# Altium PCB PCB1.PcbDoc (part 2 of 3)
Units mil, origin at the board's own origin, x right, y up, seen from the top; angles counter-clockwise.
Board outline 3937.79 x 3937.79 mil, 4 copper layers (L1, L2, L3, L4), stack 61.811 mil thick; 103 components, 203 nets, 917 pads, 494 vias.
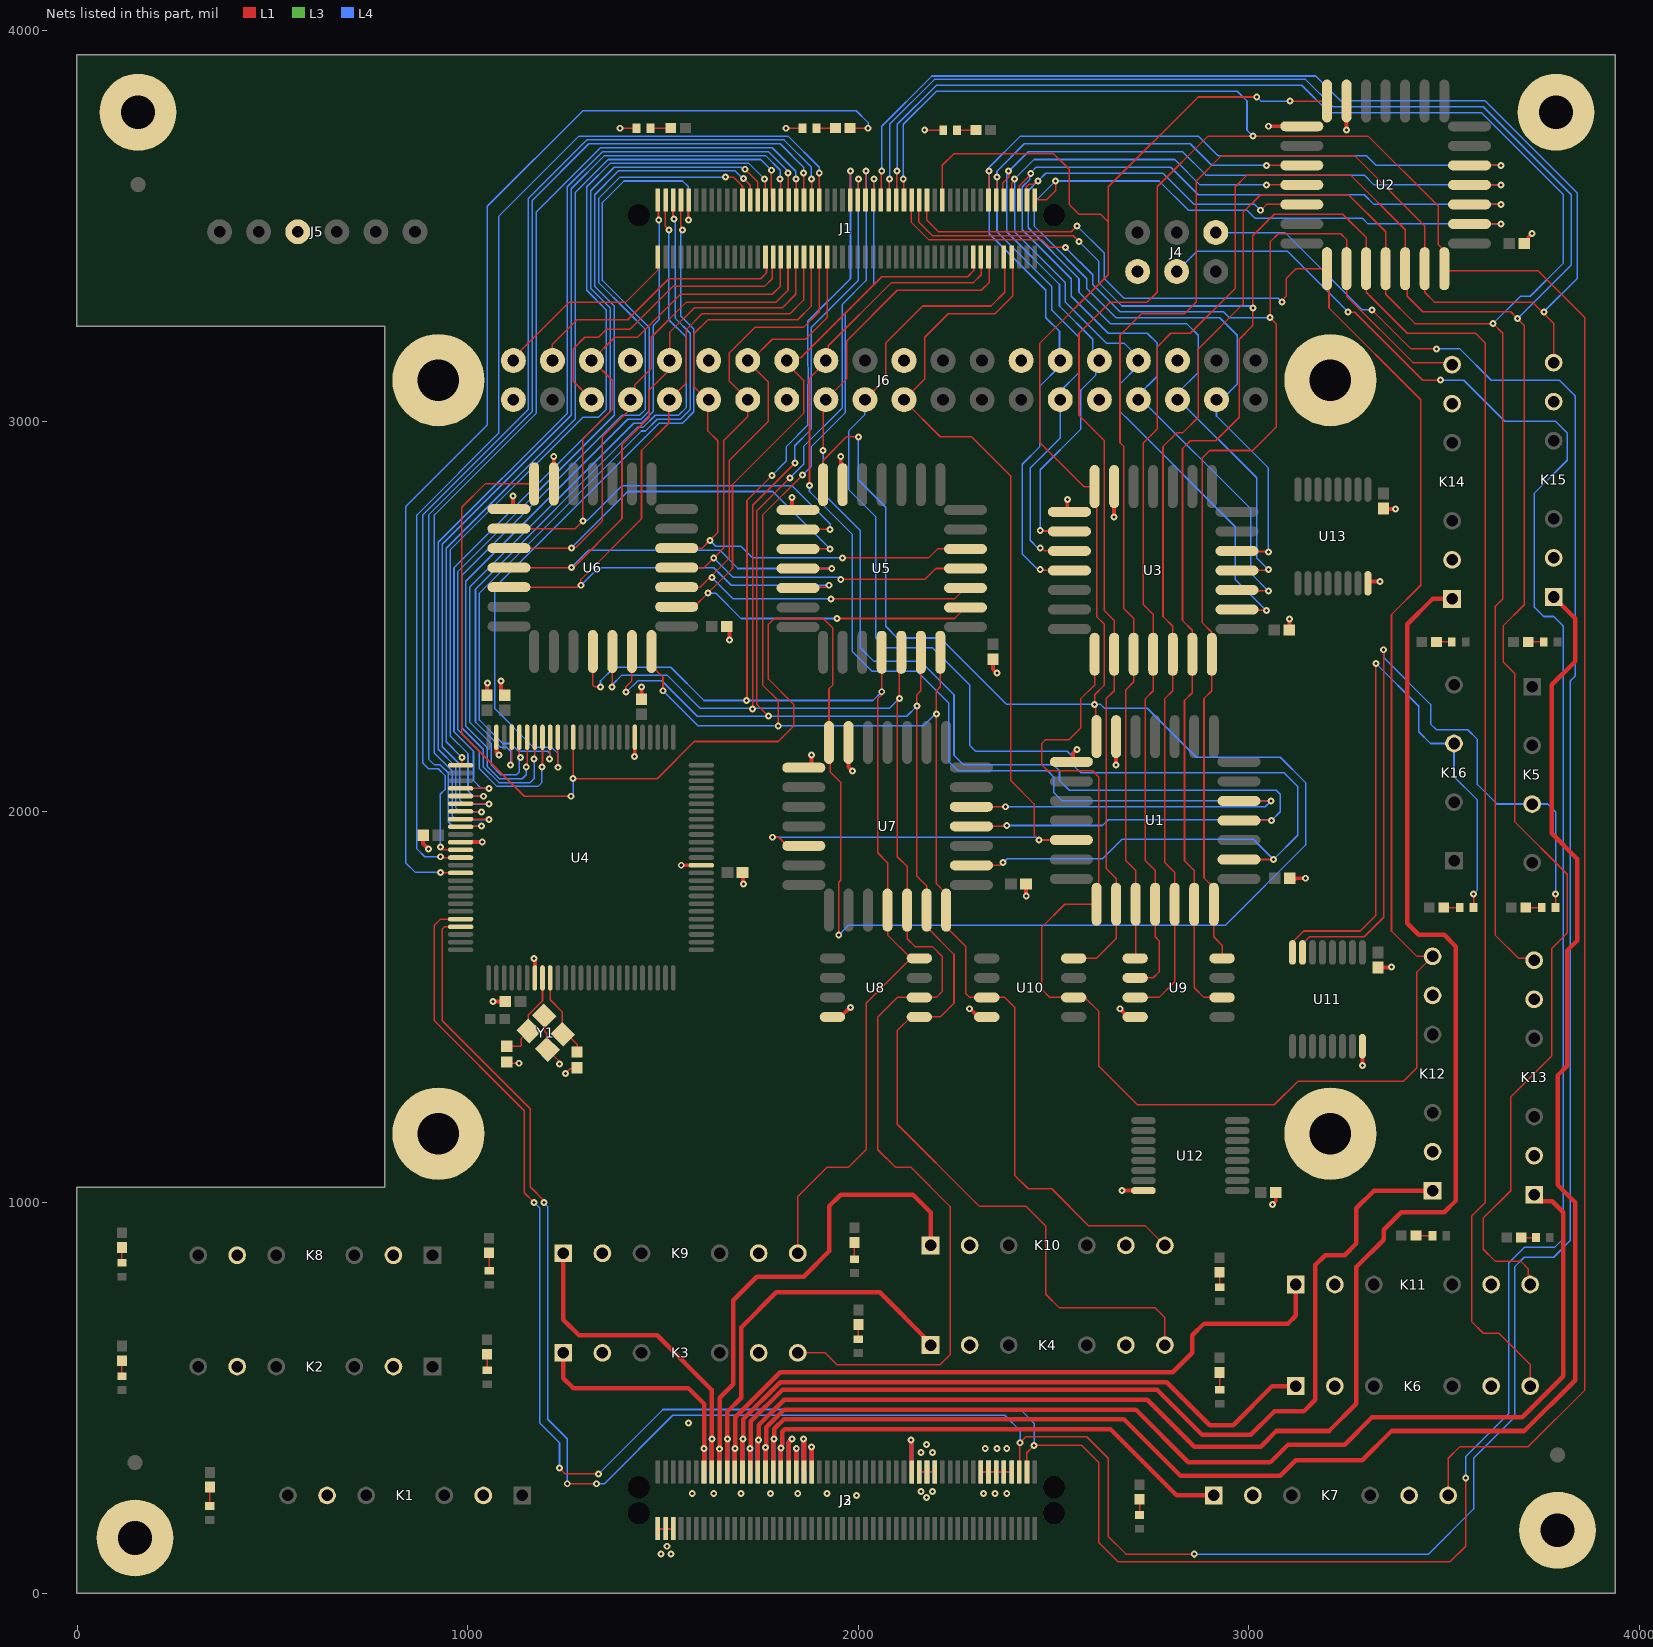
[diagram p4: the nets of this part, all layers, seen from the top]

## Via types
v1: diameter 17.72, hole 7.87, L1 to L4, 494 vias

## Nets (pads, with @x,y where several pads share a name; then routed paths per layer and width w, separated by ;. In a path a pad name is that pad's centre, name@x,y a point inside that pad or via, vN(x,y) a via of type N, cw(c..) or ccw(c..) an arc to the next point about the centre after c; other vN are vias at no path point) (continued)
COIL14: D18.1 K5.3 U11.15 | length 1919.4
  L1 w4: U11.15@3137.05,1640.16 3137.05,1662.05 3155,1680 3295,1680 3345,1730 v1(3345,2415) ; D18.1@3785,1755 v1(3785,1790)
  L4 w4: v1(3345,2415) 3345,2395 3465,2275 3465,2225 3480,2210 3560,2210 3585,2185 3585,2070 3635,2020 K5.3@3725,2020 ; K5.3@3717.1,2027.9 K5.3@3725,2020 ; v1(3785,1790) 3785,2000 3765,2020 K5.3@3725,2020
COIL15: D19.1 K16.3 U11.16 | length 1685.2
  L1 w4: U11.16@3111.46,1640.16 3111.46,1666.46 3140,1695 3285,1695 3325,1735 v1(3325,2380) ; D19.1@3575,1755 v1(3575,1790)
  L4 w4: v1(3325,2380) 3435,2270 3435,2205 3465,2175 K16.3@3525,2175 3525,2090 3585,2030 3585,1800 v1(3575,1790)
COM: J2.67 J3.68 | length 164
  L1 w4: v1(2135,391.85) v1@2136.57,390.28
  L1 w10: J2.67@2136.57,310.51 v1@2136.57,390.28
  L4 w4: v1(2135,391.85) v1@2135.79,391.06 ; J3.68@2135.79,311.3 J3.68@2136.57,310.51
  L4 w10: J3.68@2135.79,311.3 v1@2135.79,391.06
COMMAND: R3.1 U4.15 | length 3068.4
  L1 w4: v1(930,1845) 930.69,1844.31 981.24,1844.31 U4.15@981.93,1843.63 ; R3.1@1978.7,3750 v1(2025,3750)
  L4 w4: v1(930,1845) 866.14,1845 841.14,1870 841.14,2781.14 1050,2990 1050,3550 1295,3795 1995,3795 2025,3765 v1(2025,3750)
D: J2.13 J3.14 K3.1 | length 686
  L1 w11.55: K3.1@1245,615 1245,550 1270,525 1565,525 1605.03,484.97 v1(1605.03,370) ; v1(1605.03,370) 1605.08,369.92 J2.13@1605.08,310.51
  L4 w11.55: J3.14@1605.05,310.54 v1(1605.03,370)
D1: J1.53 K3.4 U5.16 U6.16 U7.16 U8.2 | length 4926.7
  L1 w4: v1(1370,2320) 1370.22,2320.22 1370.22,2410.22 U6.16@1370.43,2410.43 ; v1(1728.79,2263.79) 1730,2265 1730,2785 v1(1837.5,2892.5) ; K3.4@1845,615 1915,615 1945,585 2210,585 2235,610 2235,990 2135,1090 2095,1090 2050,1135 2050,1475 2100,1525 U8.2@2156.22,1525 2200,1525 2215,1540 2215,1630 2190,1655 2145,1655 2125,1675 U7.16@2125,1748.43 2125,1860 2100,1885 2100,2285 v1(2105,2290) 2105,2403.43 U5.16@2110,2408.43 ; J1.53@1998.78,3566.42 1999.39,3567.03 1999.39,3619.39 v1(2000,3620)
  L4 w4: v1(1370,2320) 1369.16,2320.84 1369.16,2324.16 1395,2350 1510,2350 1595,2265 1727.57,2265 v1(1728.79,2263.79) ; v1@1728.79,2265 2080,2265 v1(2105,2290) ; v1(1837.5,2892.5) 1837.5,2937.5 1879.04,2979.04 1879.04,3055.2 cw(c1916.93,3055.2) 1879.04,3055.39 1879.4,3109.55 1879.4,3129.43 1879.04,3154.67 cw(c1916.93,3155.2) 1879.04,3155.2 1879.04,3239.04 2000,3360 v1(2000,3620)
DATA: J1.75 U1.4 U2.4 U3.4 U4.89 U5.4 U6.4 U7.4 | length 9453.9
  L1 w4: U6.4@1170.43,2839.57 1044.57,2839.57 985,2780 985,2200 1145,2040 v1(1265,2040) v1@1266.36,2040 ; U4.89@1270.31,2191.07 1270.31,2085.31 v1(1270,2085) 1485,2085 1580,2180 1795,2180 1835,2220 1835,2275 1770,2340 1770,2480 1785,2495 1910,2495 1935,2470 1935,2325 1925,2315 U7.4@1925,2177.56 1928.56,2174.01 1928.56,2101.44 1955,2075 1955,1825 1950,1820 v1(1950,1685) ; U5.4@1910,2837.56 1910,2900 1970,2960 v1(2000,2960) ; J1.75@2215,3566.42 2215,3655 2245,3685 2500,3685 2540,3645 2540,3555 2565,3530 2620,3530 2640,3510 ; U1.4@2610,2192.56 2607.5,2195.06 2607.5,2272.5 v1(2605,2275) 2605,2300 2630,2325 2630,2480 2610,2500 2610,2777.1 2609.13,2777.97 2609.13,2828.43 U3.4@2605,2832.56 2577.44,2832.56 2465,2945 2465,3200 2640,3375 2640,3510 ; v1(3020,3830) 2870,3830 2640,3600 2640,3510 ; v1(3105.43,3819.57) U2.4@3200,3819.57
  L4 w4: v1(1265,2040) 1270,2045 v1(1270,2085) ; v1(1950,1685) 1975,1710 2940,1710 3145,1915 3145,2075 3080,2140 2865,2140 2740,2265 2630,2265 2620,2275 v1(2605,2275) 2380,2275 2210,2445 2100,2445 2070,2475 2070,2780 2000,2850 v1(2000,2960) ; v1(3020,3830) 3020.15,3830 3030.58,3819.57 v1(3105.43,3819.57)
E: J2.15 J3.16 K9.1 | length 918.7
  L1 w11.55: K9.1@1245,870 1245,700 1285,660 1485,660 1625,520 v1(1625,395) 1624.76,394.76 J2.15@1624.76,310.51
  L4 w11.55: J3.16@1624.76,310.51 1624.82,310.56 1624.82,394.82 v1(1625,395)
E1: J1.51 K9.4 U5.15 U6.15 U7.15 U8.4 | length 4191.8
  L1 w4: U6.15@1320.43,2410.43 1320.43,2324.57 1325,2320 v1(1340,2320) ; v1(1714.14,2285) 1715,2285.86 1715,2797.43 v1(1778.79,2861.21) ; K9.4@1845,870 1845,1015 1920,1090 1975,1090 2020,1135 2020,1510 U8.4@2135,1625 ; J1.51@1979.09,3566.42 1979.55,3566.87 1979.55,3639.55 v1(1980,3640) ; U5.15@2060,2408.43 v1(2060,2307.5) 2060,2300 2050,2290 2050,1895 2075,1870 U7.15@2075,1748.43 2075,1685 U8.4@2135,1625 ; U8.4@2156.22,1625 U8.4@2135,1625
  L4 w4: v1(1340,2320) 1340,2335 1375,2370 1520,2370 1605,2285 2037.5,2285 v1(2060,2307.5) ; v1(1778.79,2861.21) 1808.36,2890.93 1815,2897.57 1815,2934.12 1870.88,2990 1871.04,3079.37 1871.34,3112.8 1871.4,3112.86 1871.4,3126.11 1871.04,3151.89 1870.81,3210 1870.81,3255.81 1980,3365 v1(1980,3640)
F: J2.17 J3.18 K10.1 | length 1300.8
  L1 w11.55: J2.17@1644.45,310.51 v1(1644.45,369.45) ; v1@1645,369.45 1645,500 1680,535 1680,750 1740,810 1860,810 1925,875 1925,990 1955,1020 2140,1020 2185,975 K10.1@2185,890
  L4 w11.55: J3.18@1644.45,310.51 v1(1644.45,369.45)
F1: J1.57 K10.4 U5.18 U6.18 U7.18 U10.7 | length 4391.9
  L1 w4: U6.18@1470.43,2410.43 1470.43,2373.95 1482.34,2362.05 1482.95,2362.05 1500,2345 v1(1500,2310) ; v1(1795,2220) 1795,2285 1755,2325 1755,2760 v1(1857.5,2862.5) ; J1.57@2038.15,3566.42 2039.07,3567.34 2039.07,3619.07 v1(2040,3620) ; U5.18@2210,2408.43 2210,2320 2200,2310 v1(2200,2250) 2200,1815.75 2220.75,1795 2225,1795 U7.18@2225,1748.43 2225,1705 2275,1655 2275,1535 2285,1525 U10.7@2328.78,1525 2375,1525 2400,1500 2400,1070 2435,1035 2495,1035 2590,940 2735,940 K10.4@2785,890
  L4 w4: v1(1500,2310) 1590,2220 v1(1795,2220) 2166.29,2220 2196.29,2250 v1(2200,2250) ; v1(1857.5,2862.5) 1880,2885 1880,2935 1967,3022 1967,3277 2040,3350 v1(2040,3620)
G: J2.19 J3.20 K4.1 | length 1045.3
  L1 w11.55: J2.19@1664.13,310.51 1664.13,394.13 v1(1665,395) 1665,465 1700,500 1700,680 1790,770 2055,770 K4.1@2185,640
  L4 w11.55: J3.20@1664.13,310.51 1664.24,310.62 1664.24,394.24 v1(1665,395)
G1: J1.55 K4.4 U5.17 U6.17 U7.17 U8.1 | length 4931.6
  L1 w4: v1(1405,2306.72) 1405,2320 1420.43,2335.43 U6.17@1420.43,2410.43 ; v1(1770,2245) 1740,2275 1740,2770 v1(1825,2855) ; J1.55@2018.46,3566.42 2019.23,3567.18 2019.23,3639.23 v1(2020,3640) ; U5.17@2160,2408.43 2160,2310 2150,2300 v1(2150,2270.86) 2150,1835 2175,1810 U7.17@2175,1748.43 2175,1705 2245,1635 2245,1510 2210,1475 U8.1@2156.22,1475 2135,1475 2100,1440 2100,1200 2300,1000 ; 2300,1000 2310,990 2430,990 2480,940 2480,765 2515,730 2760,730 2785,705 K4.4@2785,635
  L4 w4: v1(1405,2306.72) 1406.72,2306.72 1435.86,2335.86 1496.57,2335.86 1587.43,2245 v1(1770,2245) 2124.14,2245 v1(2150,2270.86) ; v1(1825,2855) 1860,2890 1860,2935 1959,3034 1959,3299 2020,3360 v1(2020,3640)
GND: C1.1 C2.1 C3.1 C4.1 C5.1 C6.1 C7.1 C8.1 C9.1 C10.1 C11.1 C12.1 C13.1 C14.1 C15.1 C16.1 C17.1 D1.1 D2.1 D3.1 J2.2 J2.4 J2.6 J2.69 J2.71 J2.73 J2.85 J2.87 J2.89 J2.91 J2.93 J3.1 J3.3 J3.5 J3.70 J3.72 J3.74 J3.86 J3.88 J3.90 J3.92 J3.94 J4.6 J5.3 J6.6 J6.9 J6.14 J6.20 J6.25 J6.30 J6.34 J6.39 K1.5 K1.6 K2.5 K2.6 K3.5 K3.6 K4.5 K4.6 K6.5 K6.6 K7.5 K7.6 K8.5 K8.6 K9.5 K9.6 K10.5 K10.6 K11.5 K11.6 K12.5 K12.6 K13.5 K13.6 K14.5 K14.6 K15.5 K15.6 MH1.1 MH2.1 MH3.1 MH4.1 MH5.1 MH6.1 MH7.1 MH8.1 U1.3 U1.5 U2.3 U2.5 U3.3 U3.5 U4.11 U4.32 U4.62 U4.81 U4.99 U5.3 U5.5 U6.3 U6.5 U7.3 U7.5 U8.8 U9.8 U10.8 U11.8 U12.8 U13.8 Y1.2 Y1.4 | length 2514.9
  L1 w4: C4.1@885,1938.58 C4.1@886.42,1940 ; 1073.46,2151.54 v1(1080,2145) ; C5.1@1095,2298.58 C5.1@1095,2299.37 ; C13.1@1100,1359.84 1103.52,1356.33 v1(1131.25,1356.33) ; U6.5@1105.87,2775 U6.5@1115,2784.13 ; v1(1170,1625) v1@1171.89,1623.11 ; Y1.4@1195.82,1478.15 1197.22,1476.76 1197.22,1437.78 1202.78,1432.22 1202.78,1393.24 Y1.2@1204.18,1391.85 1235,1361.03 v1(1235,1355) ; v1(1250,1330) 1262.17,1342.17 1277.25,1342.17 C14.1@1280,1344.92 ; v1(1390,3750) D1.1@1432.38,3750 ; v1(1427.2,2142.2) v1@1427.8,2142.8 ; J2.2@1486.97,164.84 J2.4@1506.65,164.84 J2.6@1526.34,164.84 ; C2.1@1703.58,1845 C2.1@1705,1843.58 ; v1(1815,3750) D2.1@1857.38,3750 ; U7.5@1855,2119.8 1855,2118.43 U7.5@1860.43,2113 ; U8.8@1933.78,1475 1955,1475 U8.8@1955,1475.34 ; v1@1978.8,1499.14 v1(1980,1499.14) ; J2.69@2156.26,310.51 J2.71@2175.94,310.51 J2.73@2195.63,310.51 ; v1(2170,3745) D3.1@2217.38,3745 ; v1(2285,1495.86) v1@2286.62,1495.86 ; U10.8@2305,1477.48 2305,1475 U10.8@2328.78,1475 ; J2.85@2313.74,310.51 J2.87@2333.43,310.51 J2.89@2353.11,310.51 J2.91@2372.8,310.51 J2.93@2392.48,310.51 ; v1@2429.29,1785.71 v1(2430,1785) ; U3.5@2535,2773.43 U3.5@2540.43,2768 ; U1.5@2545,2135 2545,2128.43 U1.5@2545.43,2128 ; v1@2670,1494.98 v1(2670,1495.86) ; U9.8@2689.98,1475 U9.8@2708.78,1475 ; U13.8@3304.57,2584.92 U13.8@3309.65,2590 ; C16.1@3345,2776.42 C16.1@3346.42,2775 ; v1@3363.58,1601.42 v1(3365,1602.83)
  L1 w10: C4.1@885,1938.58 886.14,1937.44 886.14,1918.86 v1(900,1905) ; U4.11@981.93,1922.37 v1(1037.37,1922.37) ; C6.1@1050,2298.58 1050,2329.16 v1(1050.86,2330.01) ; v1(1065,1515) C1.1@1096.42,1515 ; U4.99@1073.46,2191.07 1073.81,2190.72 1073.81,2151.88 ; v1(1085,2335) 1085,2314.4 1085.83,2313.57 1085.83,2308.54 C5.1@1095,2299.37 ; U6.5@1105.87,2775 1109.01,2775 1116.21,2782.2 v1(1116.21,2808.79) ; U4.32@1171.89,1574.93 v1@1171.89,1623.11 ; U6.3@1220.43,2839.57 v1(1220.43,2909.57) ; v1@1427.8,2142.8 U4.81@1427.8,2191.07 ; C3.1@1445,2288.58 v1(1445,2320) ; v1(1546.69,1863.31) U4.62@1598.07,1863.31 ; C9.1@1663.58,2475 1670,2468.58 v1(1670,2440) ; C2.1@1705,1843.58 1704.72,1843.3 1704.72,1816.14 v1(1705.86,1815) ; U5.5@1800.94,2765.79 1808.14,2773 U5.5@1845.43,2773 ; U5.5@1825,2779.92 1830,2784.92 v1(1830,2805) ; U7.5@1855,2119.8 1859.8,2115 1880,2115 v1(1880,2145) ; U8.8@1955,1475.34 v1@1978.8,1499.14 ; v1(1955,2910) 1955,2893.54 1957.02,2891.52 1957.02,2840.55 U5.3@1960,2837.56 ; U7.3@1975,2177.56 1975,2115 v1(1985,2105) ; v1@2286.62,1495.86 U10.8@2305,1477.48 ; C7.1@2345,2390.71 2345,2365 v1(2355,2355) ; v1@2429.29,1785.71 C12.1@2429.29,1815 ; U3.5@2535,2773.43 v1(2535,2800) ; U1.5@2545,2135 2549.74,2135 2549.93,2135.2 2549.93,2149.93 v1(2560,2160) ; v1(2655,2755) U3.3@2655,2832.56 ; v1(2660,2120) U1.3@2660,2192.56 ; v1@2670,1494.98 U9.8@2689.98,1475 ; v1(2675.43,1030.43) U12.8@2729.92,1030.43 ; v1(3050,3755) U2.5@3135.43,3755 ; v1(3060,995) 3068.58,1003.58 C17.1@3068.58,1025 ; C8.1@3103.58,2465 v1(3103.58,2493.58) ; C10.1@3115,1825 3120,1830 v1(3145,1830) ; v1(3250,3745.86) U2.3@3250,3819.57 ; v1(3290.59,1350.59) U11.8@3290.59,1400 ; U13.8@3309.65,2590 v1(3335,2590) ; C15.1@3330,1601.42 v1@3363.58,1601.42 ; C16.1@3346.42,2775 v1(3375,2775) ; C11.1@3705,3455 3705.79,3455 3714.96,3464.17 3714.96,3469.96 v1(3725,3480)
  L4 w4: J3.1@1486.97,164.84 J3.3@1506.65,164.84 J3.5@1526.34,164.84 ; J3.70@2156.26,310.51 J3.72@2175.94,310.51 J3.74@2195.63,310.51 ; J3.86@2313.74,310.51 J3.88@2333.43,310.51 J3.90@2353.11,310.51 J3.92@2372.8,310.51 J3.94@2392.48,310.51
  other v1: 1495,100 1520,100 1510,120 2175,245 1995,250 1575,255 1630,255 1700,255 1775,255 1845,255 1920,255 2320,255 2350,255 2380,255 2160,260 2190,260 2160,360 2190,360 2325,370 2355,370 2380,370 2175,380 1565,435
GPIO1: J1.43 U4.13 | length 2849.8
  L1 w4: v1(930,1885) 932,1883 U4.13@981.93,1883 ; v1(1900,3635) 1900.18,3634.82 1900.18,3566.59 J1.43@1900.35,3566.42
  L4 w4: v1(930,1885) 890,1885 870,1905 870,2760 1079.04,2969.04 1079.04,3524.04 1285,3730 1820,3730 1900,3650 v1(1900,3635)
GPIO2: J1.41 U4.12 | length 2780.1
  L1 w4: v1(930,1910) 937.32,1902.68 U4.12@981.93,1902.68 ; v1(1880,3620) 1880.33,3619.67 1880.33,3566.75 J1.41@1880.67,3566.42
  L4 w4: v1(930,1910) 930,2045 942.07,2057.07 942.07,2092.93 925,2110 900,2110 885,2125 885,2760 1155,3030 1155,3570 1305,3720 1810,3720 1880,3650 v1(1880,3620) 1880,3610
GPIO3: J1.39 U4.9 | length 2736.7
  L1 w4: U4.9@981.93,1961.74 982.8,1962.6 1034.13,1962.6 v1(1035,1963.47) ; v1(1860,3635) 1860.49,3634.51 1860.49,3566.91 J1.39@1860.98,3566.42
  L4 w4: v1(1035,1963.47) 961.53,1963.47 950.07,1974.93 950.07,2099.93 930,2120 915,2120 900,2135 900,2760 1165,3025 1165,3565 1310,3710 1800,3710 1860,3650 v1(1860,3635)
GPIO4: J1.37 U4.8 | length 2676.5
  L1 w4: U4.8@981.93,1981.42 982.64,1980.71 1054.29,1980.71 v1(1055,1980) ; v1(1840,3620) 1840.65,3619.35 1840.65,3567.07 J1.37@1841.3,3566.42
  L4 w4: v1(1055,1980) 970,1980 960,1990 960,2105 915,2150 915,2760 1175,3020 1175,3535 1340,3700 1780,3700 1840,3640 v1(1840,3620)
GPIO5: J1.35 U4.7 | length 2565.2
  L1 w4: U4.7@981.93,2001.11 982.48,2000.55 1034.45,2000.55 v1(1035,2000) ; v1(1820,3635) 1820.81,3634.19 1820.81,3567.22 J1.35@1821.61,3566.42
  L4 w4: v1(1035,2000) 980,2000 970,2010 970,2115 925,2160 925,2690 1255,3020 1255,3600 1345,3690 1770,3690 1820,3640 v1(1820,3635)
GPIO6: J1.33 U4.6 | length 2535.5
  L1 w4: U4.6@981.93,2020.79 982.32,2020.4 1054.6,2020.4 v1(1055,2020) ; v1(1800,3620) 1800.96,3619.04 1800.96,3567.38 J1.33@1801.93,3566.42
  L4 w4: v1(1055,2020) 990,2020 980,2030 980,2121.71 935,2166.71 935,2685 1265,3015 1265,3595 1350,3680 1762.43,3680 1800,3642.43 v1(1800,3620)
GPIO7: J1.29 U4.5 | length 2429.7
  L1 w4: U4.5@981.93,2040.48 982.17,2040.24 1039.76,2040.24 v1(1040,2040) ; v1(1760,3620) 1761.28,3618.72 1761.28,3567.7 J1.29@1762.56,3566.42
  L4 w4: v1(1040,2040) 1015,2040 1000.86,2054.14 1000.86,2149.14 955,2195 955,2670 1295,3010 1335,3010 1355,3030 1355,3285 1305,3335 1305,3600 1365.86,3660.86 1719.14,3660.86 v1(1760,3620)
GPIO8: J1.27 U4.4 | length 2352.7
  L1 w4: U4.4@981.93,2060.16 982.01,2060.08 1054.92,2060.08 v1(1055,2060) ; v1(1710,3645) 1742.87,3612.13 J1.27@1742.87,3566.42
  L4 w4: v1(1055,2060) 1035,2060 1015,2080 1015,2155 965,2205 965,2625 1365,3025 1365,3290 1315,3340 1315,3590 1375,3650 1701.29,3650 1706.29,3645 v1(1710,3645)
GPIO9: J1.31 U4.1 | length 2257.5
  L1 w4: U4.1@981.93,2119.22 985,2122.29 v1(985,2139.14) ; v1(1777.5,3642.5) 1777.5,3571.16 J1.31@1782.24,3566.42
  L4 w4: v1(985,2139.14) 945,2179.14 945,2675 1275,3005 1275,3585 1360,3670 1750,3670 v1(1777.5,3642.5) 1777.5,3632.5
GPIO10: J1.3 U4.97 | length 1855.1
  L1 w4: v1(1110,2120) 1112.83,2122.83 U4.97@1112.83,2191.07 ; J1.3@1506.65,3566.42 1505.83,3565.59 1505.83,3499.17 v1(1515,3490)
  L4 w4: v1(1110,2120) 1110,2155 1100,2165 1085,2165 1020,2230 1020,2570 1435,2985 1450,2985 1480,3015 1540,3015 1560,3035 1560,3215 1515,3260 v1(1515,3490)
GPIO11: J1.1 U4.96 | length 1857.5
  L1 w4: U4.96@1132.52,2191.07 1132.52,2142.34 1135,2139.86 v1(1135,2139.14) ; J1.1@1486.97,3566.42 1488.46,3564.92 1488.46,3515.69 v1(1489.14,3515.01)
  L4 w4: v1@1132.52,2137.48 1132.52,2102.52 1125,2095 1085,2095 1060,2120 1060,2175 1005,2230 1005,2575 1425,2995 1445,2995 1475,3025 1475,3245 1490,3260 1490,3515.06 1489.19,3515.06 v1(1489.14,3515.01)
GPIO12: J1.9 U4.95 | length 2333.4
  L1 w4: v1(1150,2115) 1152.2,2117.2 U4.95@1152.2,2191.07 ; v1(1565,3515) 1565.35,3515.35 1565.35,3566.06 J1.9@1565.71,3566.42 J1.9@1567.85,3564.27
  L4 w4: v1(1150,2115) 1150,2095 1140,2085 1081.31,2085 1050,2116.31 1050,2165 995,2220 995,2590 1410,3005 1443.69,3005 1465,3026.31 1465,3240 1345,3360 1345,3560 1400,3615 1550,3615 1565,3600 v1(1565,3515)
GPIO13: J1.23 U4.94 | length 2442.2
  L1 w4: v1(1170,2135) 1171.89,2136.89 U4.94@1171.89,2191.07 ; v1(1660,3625) 1680,3625 1703.5,3601.5 J1.23@1703.5,3566.42
  L4 w4: v1(1170,2135) 1170,2085 1160,2075 1080,2075 1040,2115 1040,2160 985,2215 985,2605 1395,3015 1440,3015 1455,3030 1455,3235 1410,3280 ; 1410,3280 1335,3355 1335,3570 1390,3625 v1(1660,3625)
GPIO14: J1.25 U4.93 | length 2455.1
  L1 w4: v1(1190,2115) 1191.57,2116.57 U4.93@1191.57,2191.07 ; v1(1706.41,3621.01) 1723.19,3604.24 J1.25@1723.19,3566.42
  L4 w4: v1(1190,2115) 1190,2075 1180,2065 1075,2065 1030,2110 1030,2155 975,2210 975,2615 1375,3015 1375,3295 1325,3345 1325,3580 1385.86,3640.86 1684.14,3640.86 1703.99,3621.01 v1(1706.41,3621.01)
GPIO15: J1.5 U4.92 | length 1901.5
  L1 w4: v1(1210,2135) 1210.63,2135.63 1210.63,2190.44 U4.92@1211.26,2191.07 ; J1.5@1526.34,3566.42 1525.67,3565.75 1525.67,3519.33 v1(1527.83,3517.17)
  L4 w4: v1(1210,2135) 1210,2150 1205,2155 1130,2155 1110,2175 1090,2175 1030,2235 1030,2560 1445,2975 1455,2975 1485,3005 1545,3005 1570,3030 1570,3225 1530.86,3264.14 1530.86,3514.14 v1(1527.83,3517.17)
GPIO16: J1.7 U4.91 | length 1888.7
  L1 w4: v1(1230.94,2114.06) U4.91@1230.94,2191.07 ; J1.7@1546.02,3566.42 1545,3565.39 1545,3498.71 1550,3493.71 v1(1550,3490)
  L4 w4: v1(1230.94,2114.06) 1230.94,2149.06 1215,2165 1168.42,2165 1069.14,2264.27 1069.14,2574.14 1490,2995 1550,2995 1579.04,3024.04 1579.04,3235.96 1545,3270 1545,3485 v1(1550,3490)
H: J2.21 J3.22 K11.1 | length 1848.1
  L1 w11.55: J2.21@1683.82,310.51 1683.82,369.95 v1(1683.87,370) ; v1@1685,369.95 1685,450 1800,565 2805,565 2855,615 2855,660 2885,690 3100,690 3120,710 K11.1@3120,790
  L4 w11.55: J3.22@1683.82,310.51 v1(1683.87,370)
H1: J1.61 K11.4 U1.15 U2.16 U3.15 U9.6 | length 8434.7
  L1 w4: J1.61@2077.52,3566.42 2078.76,3567.66 2078.76,3618.76 v1(2080,3620) ; U9.6@2708.78,1575 2755,1575 2770,1590 2770,1670 2760,1680 U1.15@2760,1763.43 2760,1850 2735,1875 2735,2290 2755,2310 U3.15@2755,2403.43 2755,2505 2730,2530 2730,2945 2765,2980 2765,3190 2800,3225 2850,3225 2965,3340 2965,3600 2995,3630 3260,3630 3400,3490 U2.16@3400,3390.43 ; U2.16@3405,3375 3405,3320 3445,3280 3670,3280 v1(3687.5,3262.5) 3705,3245 3705,2530 3650.55,2475.55 3650.55,2384.45 3680,2355 3680,1975 3815,1840 3815,1690 3775,1650 3775,1375 3670,1270 3670,1030 3600,960 3600,880 3630,850 3695,850 3715.03,829.97 K11.4@3715.03,794.97
  L1 w11.55: K11.4@3715.03,794.97 K11.4@3720,790
  L4 w4: v1(2080,3620) 2080,3760 2195,3875 3145,3875 3215,3805 3600,3805 3825,3580 3825,3400 v1(3687.5,3262.5)
I: J2.23 J3.24 K6.1 | length 1761.6
  L1 w11.55: J2.23@1703.5,310.51 1703.5,393.5 v1(1705,395) 1705,445 1800,540 2790,540 2900,430 2960,430 3060,530 K6.1@3120,530
  L4 w11.55: J3.24@1703.5,310.51 1703.5,391.84 1705,393.33 v1(1705,395)
I1: J1.69 K6.4 U1.17 U2.14 U3.17 U9.2 | length 6789.5
  L1 w4: J1.69@2155,3566.42 2155,3510 2190,3475 2550,3475 v1(2565,3460) ; U9.2@2931.22,1525 2885,1525 2860,1550 U1.17@2860,1763.43 2860,1850 2835,1875 2835,2285 2855,2305 U3.17@2855,2403.43 2855,2465 2830,2490 2830,2930 2850,2950 2915,2950 2975,3010 2975,3210 3010,3245 v1(3010,3290) 3010,3475 3065,3530 3240,3530 3300,3470 U2.14@3300,3390.43 3300,3330 3405,3225 3580,3225 3605,3200 3605,1000 3570,965 3570,695 3600,665 3640,665 3720,585 K6.4@3720,530
  L4 w4: v1(2565,3460) 2615,3410 2615,3355 2675,3295 3005,3295 v1(3010,3290)
J: J2.25 J3.26 K12.1 | length 2529.2
  L1 w11.55: J2.25@1723.19,310.51 v1(1723.19,369.95) 1724.42,371.18 1724.42,375.54 1725,376.12 1725,440 1805,520 2765,520 2880,405 3005,405 3065,465 3140,465 3170,495 3170,840 3195,865 3245,865 3275,895 3275,985 3320,1030 K12.1@3470,1030
  L4 w11.55: J3.26@1723.19,310.51 v1(1723.19,369.95)
J1: J1.71 K12.4 U1.12 U2.12 U3.12 U10.2 | length 5924.9
  L1 w4: J1.71@2175,3566.42 2175,3515 2205,3485 2545,3485 v1(2560,3500) ; U3.12@2605,2403.43 2605,2325 2570,2290 2570,2215 2540,2185 2480,2185 2470,2175 2470,2120 2485,2105 2600,2105 2615,2090 U1.12@2615,1763.43 ; U1.12@2610,1763.43 2528.43,1763.43 2470,1705 2470,1545 2490,1525 U10.2@2551.22,1525 2580,1525 2615,1490 2615,1350 2715,1250 3065,1250 3125,1310 3395,1310 3430,1345 3430,1590 K12.4@3470,1630 3430,1630 3365,1695 3365,2505 3440,2580 3440,3055 3205,3290 3205,3334.97 3204.13,3335.84 3204.13,3386.3 U2.12@3200,3390.43 3120.43,3390.43 3095,3365 3095,3320 3084.16,3309.16 3084.16,3305.84 v1(3085,3305)
  L4 w4: v1(2560,3500) 2630,3430 2630,3365 2680,3315 3075,3315 v1(3085,3305)
K: J2.27 J3.28 K14.1 | length 4251.7
  L1 w11.55: J2.27@1742.87,310.51 1742.87,388.7 1744.63,390.46 v1(1744.63,392.13) 1744.63,429.63 1810,495 2740,495 2860,375 3030,375 3070,415 3205,415 3275,485 3275,835 3345,905 3345,930 3390,975 3500,975 3530,1005 3530,1655 3500,1685 3435,1685 3405,1715 3405,2480 3470,2545 K14.1@3520,2545
  L4 w11.55: J3.28@1742.87,310.51 1742.87,388.7 1744.63,390.46 v1(1744.63,392.13)
K1: J1.67 K14.4 U1.18 U2.13 U3.18 U9.4 | length 3814.1
  L1 w4: J1.67@2135,3566.42 2135,3510 2180,3465 2470,3465 2490,3445 v1(2530,3445) ; U1.18@2910,1763.43 2910,1680 2931.22,1658.78 U9.4@2931.22,1625 ; U1.18@2910,1805.75 2885,1830.75 2885,2290 2905,2310 U3.18@2905,2403.43 2905,2460 2880,2485 2880,2905 2900,2925 3010,2925 3070,2985 3070,3249.14 v1(3054.14,3265) ; v1@3055,3265 3055,3460 3075,3480 3235,3480 3250,3465 U2.13@3250,3390.43 3250,3320 3420,3150 K14.4@3515,3150
  L1 w11.55: U1.18@2910,1763.43 U1.18@2910,1805.75 ; K14.4@3515,3150 3515,3145 K14.4@3520,3145
  L4 w4: v1(2530,3445) 2600,3375 2600,3350 2670,3280 2935,3280 2950,3265 v1(3054.14,3265)
L: J2.29 J3.30 K13.1 | length 2896.8
  L1 w11.55: J2.29@1762.56,310.51 v1(1762.56,372.44) 1763.74,373.62 1763.74,377.98 1764.27,378.51 1764.27,424.27 1810,470 2710,470 2845,335 3055,335 3100,380 3245,380 3315,450 3700,450 3805,555 3805,975 3776.86,1003.13 3746.86,1003.13 K13.1@3730,1020
  L4 w11.55: J3.30@1762.56,310.51 v1(1762.56,372.44)
L1: J1.63 K13.4 U1.16 U2.15 U3.16 U9.7 | length 7274.9
  L1 w4: J1.63@2097.2,3566.42 2098.17,3567.39 2098.17,3639.03 v1(2099.14,3640) ; U9.7@2708.78,1525 2770,1525 2810,1565 U1.16@2810,1763.43 2810,1845 2785,1870 2785,2290 2805,2310 U3.16@2805,2403.43 ; U3.16@2805,2415 2805,2475 2780,2500 2780,2935 2815,2970 2830,2970 2870,3010 2870,3185 2985,3300 2985,3535 3030,3580 3255,3580 3350,3485 U2.15@3350,3390.43 3350,3325 3425,3250 v1(3625,3250) 3650,3225 3650,2545 3630,2525 3630,1685 3690.03,1624.96 K13.4@3725.03,1624.96
  L1 w11.55: K13.4@3725.03,1624.96 K13.4@3730,1620
  L4 w4: v1(2099.14,3640) 2100,3640.86 2100,3760 2200,3860 3135,3860 3205,3790 3595,3790 3805,3580 3805,3405 3720,3320 3695,3320 v1(3625,3250)
M: J2.31 J3.32 K15.1 | length 4536.8
  L1 w11.55: J2.31@1782.24,310.51 1782.24,393.34 1785.08,396.18 1785.08,420.45 1809.62,445 2680,445 2825,300 3080,300 3120,340 3290,340 3365,415 3705,415 3835,545 3835,1000 3790,1045 3790,1325 3815,1350 3815,1645 3840,1670 3840,1880 3775,1945 3775,2325 3835,2385 3835,2495 K15.1@3780,2550
  L4 w11.55: J3.32@1782.24,310.51 1782.24,393.34 v1(1783.9,395)
M1: J1.59 K15.4 U1.14 U2.17 U3.14 U9.5 | length 5978.7
  L1 w4: J1.59@2057.83,3566.42 2058.92,3567.5 2058.92,3638.92 v1(2060,3640) ; U9.5@2708.78,1625 2710,1626.22 U1.14@2710,1763.43 2710,1850 2685,1875 2685,2312.71 2705,2332.71 U3.14@2705,2403.43 2705,2495 2680,2520 2680,2935 2670,2945 2670,3220 2725,3275 2835,3275 2865,3305 2865,3615 2930,3680 3270,3680 3450,3500 U2.17@3450,3390.43 3450,3330 3475,3305 3725,3305 v1@3752.5,3277.5 ; v1(3755,3280) v1@3752.5,3277.5 ; K15.4@3780,3150 3780,3250 v1@3752.5,3277.5
  L4 w4: v1(2060,3640) 2060,3755 2188.65,3883.65 3171.35,3883.65 3235,3820 3605,3820 3840,3585 3840,3365 v1(3755,3280)
MISO: J2.95 J4.1 U4.22 | length 8517
  L1 w4: U4.22@981.93,1705.83 940.83,1705.83 935,1700 935,1465 1160,1240 1160,1040 1195,1005 v1(1195,1000) ; v1(1255,280) v1(1330,280) ; J2.95@2412.17,310.51 2413.15,311.5 2413.15,384.01 v1(2414.14,385) 2429.14,400 2585,400 2640,345 2640,145 2685,100 v1(2860,100) ; v1(3315,3285) 3415,3185 v1(3480,3185)
  L3 w4: v1(2860,100) 2860,91.72 2860.86,90.86
  L4 w4: v1(1195,1000) 1205,990 1205,445 1255,395 v1(1255,280) ; v1(1330,280) 1350,280 1525,455 2375,455 2415,415 2415,385.86 v1(2414.14,385) ; v1(2860,100) 3460,100 3575,215 3575,345 3680,450 3680,835 3705,860 3780,860 3823,903 3823,2335.34 3835,2347.34 3835,3065 3795,3105 3620,3105 3540,3185 v1(3480,3185) ; J4.1@2915,3483 3092,3483 3290,3285 v1(3315,3285)
MOSI: J2.97 J4.4 U4.21 | length 8691.6
  L1 w4: U4.21@981.93,1725.52 930.52,1725.52 915,1710 915,1465 1145,1235 1145,1025 v1(1170,1000) ; v1(1235,320) 1250,305 v1(1335,305) ; J2.97@2431.85,310.51 2430.93,311.44 2430.93,359.07 v1(2450,378.15) 2571.85,378.15 2615,335 2615,130 2665,80 3515,80 3555,120 v1(3555,295) ; v1(3253.71,3280) 3254.58,3279.14 3270.86,3279.14 3445,3105 v1(3490,3105)
  L4 w4: v1(1170,1000) 1185,985 1185,435 1235,385 v1(1235,320) ; v1(1335,305) 1500,470 2415,470 2450,435 v1(2450,378.15) ; J4.4@2815,3383 2867,3435 3098.71,3435 v1(3253.71,3280) ; v1(3490,3105) 3550,3105 3655,3000 3785,3000 3815,2970 3815,2900 3730,2815 3730,2525 3755,2500 3780,2500 3805,2475 3805,908 3782,885 3705,885 3665,845 3665,460 3555,350 v1(3555,295)
N: J2.33 J3.34 K7.1 | length 1343.6
  L1 w11.55: J2.33@1801.93,310.51 v1(1801.93,371.93) 1803.11,373.11 1803.11,377.47 1805,379.36 1805,413.23 1811.77,420 2645,420 2815,250 K7.1@2910,250
  L4 w11.55: J3.34@1801.93,310.51 v1(1801.93,371.93)
N1: J1.65 K7.4 U1.13 U2.18 U3.13 U10.4 | length 8153.7
  L1 w4: v1(2115,3620) 2115.94,3619.06 2115.94,3567.36 J1.65@2116.89,3566.42 ; U10.4@2551.22,1625 2610,1625 2660,1675 U1.13@2660,1763.43 2660,1830 2635,1855 2635,2290 2655,2310 U3.13@2655,2403.43 2655,2490 2630,2515 2630,2950 2565,3015 2565,3225 2645,3305 2740,3305 2765,3330 2765,3600 2895,3730 v1(3010,3730) 3305,3730 3485,3550 3485,3451.56 U2.18@3500,3436.56 ; U2.18@3500,3390.43 3505.43,3385 3740,3385 3860,3265 3860,520 3715,375 3540,375 3510,345 K7.4@3510,250
  L1 w11.55: U2.18@3500,3390.43 U2.18@3500,3436.56
  L4 w4: v1(2115,3620) 2115,3760 2200,3845 2970,3845 2995,3820 2995,3745 v1(3010,3730)
NetC13_2: C13.2 U4.33 Y1.1 | length 234.5
  L1 w4: C13.2@1100,1400 1134.92,1400 1137.3,1402.37 1137.3,1419.62 Y1.1@1156.85,1439.18 1155.46,1440.57 1155.46,1480.46 1191.57,1516.57 U4.33@1191.57,1574.93
NetC14_2: C14.2 U4.34 Y1.3 | length 224.8
  L1 w4: U4.34@1211.26,1574.93 1211.26,1518.74 1241.76,1488.24 1241.76,1432.22 1252.78,1432.22 1280,1405 C14.2@1280,1385.08
NetD1_2: D1.2 R2.2 | length 52.2
  L1 w4: D1.2@1467.82,3750 R2.2@1520,3750
NetD2_2: D2.2 R3.2 | length 48.5
  L1 w4: D2.2@1892.82,3750 R3.2@1941.3,3750
NetD3_2: D3.2 R4.2 | length 48.5
  L1 w4: D3.2@2252.82,3745 R4.2@2301.3,3745
NetD4_2: D4.2 R5.2 | length 48.5
  L1 w4: D4.2@340,222.82 R5.2@340,271.3
NetD5_2: D5.2 R6.2 | length 44.6
  L1 w4: D5.2@2925,520.43 R6.2@2925,565
NetD6_2: D6.2 R7.2 | length 46.3
  L1 w4: D6.2@1055,825 R7.2@1055,871.3
NetD7_2: D7.2 R8.2 | length 37.6
  L1 w4: R8.2@3697.4,910 D7.2@3735,910
NetD8_2: D8.2 R9.2 | length 39.6
  L1 w4: D8.2@115,555.43 R9.2@115,595
NetD9_2: D9.2 R10.2 | length 40
  L1 w4: D9.2@2720,200 R10.2@2720,240
NetD10_2: D10.2 R11.2 | length 42.6
  L1 w4: D10.2@1990,855 R11.2@1990,897.6
NetD11_2: D11.2 R12.2 | length 39.6
  L1 w4: R12.2@3480,2435 D11.2@3519.57,2435
NetD12_2: D12.2 R13.2 | length 40.9
  L1 w4: D12.2@1050,570.43 R13.2@1050,611.3
NetD13_2: D13.2 R14.2 | length 39.6
  L1 w4: D13.2@115,845.43 R14.2@115,885
NetD14_2: D14.2 R15.2 | length 38.5
  L1 w4: D14.2@2925,782.82 R15.2@2925,821.3
NetD15_2: D15.2 R16.2 | length 39.6
  L1 w4: R16.2@3715,2435 D15.2@3754.57,2435
NetD16_2: D16.2 R17.2 | length 37.6
  L1 w4: D16.2@2000,650 R17.2@2000,687.6
NetD17_2: D17.2 R18.2 | length 42.6
  L1 w4: R18.2@3427.4,915 D17.2@3470,915
NetD18_2: D18.2 R19.2 | length 40.9
  L1 w4: R19.2@3708.7,1755 D18.2@3749.57,1755
NetD19_2: D19.2 R20.2 | length 40.9
  L1 w4: R20.2@3498.7,1755 D19.2@3539.57,1755
O: J2.35 J3.36 | length 175.6
  L1 w11.55: J2.35@1821.61,310.51 1821.61,386.43 v1(1830,394.82)
  L4 w11.55: J3.36@1821.61,310.51 1821.61,386.43 v1(1830,394.82)
P: J2.37 J3.38 | length 119
  L1 w11.55: v1(1841.25,370) 1841.25,368.75 1841.3,368.7 J2.37@1841.3,310.51
  L4 w11.55: J3.38@1841.27,310.54 v1(1841.25,370)
Q: J2.39 J3.40 | length 169.4
  L1 w11.55: v1(1860,394.82) 1860.98,393.83 J2.39@1860.98,310.51
  L4 w11.55: v1(1860,394.82) 1860.88,393.94 1860.88,310.62 J3.40@1860.98,310.51
R: J2.41 J3.42 | length 127.2
  L1 w11.55: v1(1880.62,373.66) 1880.67,373.61 J2.41@1880.67,310.51
  L3 w10: v1@1880,373.04 v1(1880.62,373.66)
  L4 w11.55: J3.42@1880.67,310.51 v1@1880.64,373.64
RASP_GPIO0: J1.44 J6.27 U5.22 U6.22 | length 1783.6
  L1 w4: U6.22@1535,2625 1605,2625 v1(1630,2650) 1655,2675 1655,2950 1716.93,3011.93 J6.27@1716.93,3055.2 1716.93,3063.07 1709.06,3063.07 1670,3102.13 1670,3175 1735,3240 1860,3240 1900,3280 J1.44@1900,3420.75 ; v1(1955,2595) 2170,2595 2198,2623 U5.22@2274.57,2623
  L4 w4: v1(1630,2650) 1680,2600 1950,2600 v1(1955,2595)
RASP_GPIO1: J1.46 J6.28 U5.21 U6.21 | length 1822.3
  L1 w4: U6.21@1535,2575 1595,2575 1670,2650 1670,2900 1770,3000 1770,3100 J6.28@1715.86,3154.14 ; J6.28@1716.93,3155.2 1725.2,3155.2 1780,3210 1865,3210 1920,3265 J1.46@1920.04,3420.75 ; v1(1930,2545) 2246.57,2545 U5.21@2274.57,2573
  L4 w4: v1(1625,2600) 1680,2545 v1(1930,2545)
RASP_GPIO2: J1.99 J6.3 U2.20 U3.23 | length 2874.2
  L1 w4: J1.99@2451.54,3566.42 2481.42,3566.42 2505,3590 v1(2505,3615) ; U3.23@2969.57,2668 2971.07,2666.5 3048.5,2666.5 v1(3050,2665) ; U2.20@3564.57,3505 v1(3645,3505)
  L4 w4: J6.3@2921.93,3060.2 2921.93,3056.93 2916.93,3056.93 J6.3@2916.93,3055.2 ; v1(3050,2665) 3050,2880 2916.93,3013.07 J6.3@2916.93,3055.2 ; v1(3645,3505) 3305,3505 3290,3520 3015,3520 2995,3540 2845,3540 2770,3615 v1(2505,3615) 2450,3560 2450,3500 2480,3470 2585,3365 2585,3340 2660,3265 2925,3265 2970,3220 2970,3095 2930.2,3055.2 J6.3@2916.93,3055.2
RASP_GPIO3: J1.97 J6.5 U2.9 U3.22 | length 2300.5
  L1 w4: J1.97@2431.85,3566.42 2430,3568.27 2430,3600 2436.19,3606.19 2447.8,3606.19 2456.61,3615 v1(2460,3615) ; U3.22@2969.57,2618 2970.57,2619 3049,2619 v1(3050,2620) ; v1(3030,3540) 3045,3555 U2.9@3135.43,3555
  L4 w4: J6.5@2816.93,3055.2 J6.5@2818.36,3055.2 ; v1(3030,3540) 3015,3555 2860,3555 2780,3635 2480,3635 v1(2460,3615) 2435,3590 2435,3495 2565,3365 2565,3330 2645,3250 2840,3250 2870,3220 2870,3125 2818.36,3073.36 J6.5@2818.36,3055.2 ; v1(3050,2620) 3020,2650 3020,2855 2819.8,3055.2 J6.5@2818.36,3055.2
RASP_GPIO4: J1.95 J6.7 U2.21 U3.21 | length 2928.8
  L1 w4: J1.95@2412.17,3566.42 2412.17,3602.17 2441.38,3631.38 v1(2441.38,3633.62) ; U3.21@2969.57,2568 2971.07,2566.5 3048.5,2566.5 v1(3050,2565) ; U2.21@3564.57,3555 v1(3645,3555)
  L4 w4: v1(2441.38,3633.62) 2438.76,3630.99 2438.76,3618.76 2420,3600 2420,3490 2545,3365 2545,3320 2640,3225 2740,3225 2765,3200 2765,3115 2716.93,3066.93 J6.7@2716.93,3055.2 2724.8,3055.2 3005,2775 3005,2610 v1(3050,2565) ; v1@2444.47,3639.47 2455,3650 2800,3650 2870,3580 3295,3580 3320,3555 v1(3645,3555)
  L4 w11.55: v1(2441.38,3633.62) v1@2441.38,3635.29
RASP_GPIO5: J1.42 J6.29 U5.23 U6.23 | length 1787.9
  L1 w4: U6.23@1535,2675 1600,2675 v1(1620,2695) 1640,2715 1640,2950 1615,2975 1615,3053.27 J6.29@1616.93,3055.2 1615,3055.2 1612.94,3055.2 1579.04,3089.11 1579.04,3155.2 1579.04,3224.04 1615,3260 1845,3260 1880,3295 J1.42@1880,3410 ; v1(1960,2650) 2180,2650 2203,2673 U5.23@2274.57,2673
  L4 w4: v1(1620,2695) 1635,2680 1700,2680 1730,2650 v1(1960,2650)
RASP_GPIO6: J1.40 J6.31 U5.9 U6.9 | length 2156.6
  L1 w4: U6.9@1105.87,2575 1281.29,2575 1286.29,2580 v1(1290,2580) 1290,2595 1445,2750 1445,2925 1515,2995 J6.31@1515,3055.2 ; J6.31@1516.93,3055.2 1530.2,3055.2 1530.2,3068.47 1560,3098.27 1560,3235 1600,3275 1825,3275 1860,3310 J1.40@1860,3420.75 ; U5.9@1845.43,2573 1847.44,2575 1916.29,2575 1921.29,2580 v1(1925,2580)
  L4 w4: v1(1290,2580) 1335,2625 1630,2625 1675,2580 v1(1925,2580)
RASP_GPIO7: J1.84 J6.26 U5.20 U6.20 | length 2118.3
  L1 w4: U6.20@1535,2525 1580,2525 v1(1615,2560) 1678,2623 1678,2838 1860,3020 1860,3105 J6.26@1813.36,3151.64 ; J6.26@1816.93,3155.2 1824.2,3162.48 1852.48,3162.48 2060,3370 2280,3370 2295,3385 J1.84@2295,3425 ; v1(1945,2495) 2246.57,2495 U5.20@2274.57,2523
  L4 w4: v1(1615,2560) 1635,2560 1700,2495 v1(1945,2495)
RASP_GPIO8: J1.86 J6.24 U1.23 U7.23 | length 3546.3
  L1 w4: v1(1875,2835) 1875,3110 1900,3135 J6.24@1910,3135 ; J6.24@1916.93,3155.2 1923.09,3161.36 1923.09,3193.09 2085,3355 2295,3355 2315,3375 J1.86@2315,3425 ; U7.23@2289.57,2013 v1(2377,2013) ; U1.23@2974.57,2028 v1(3057,2028)
  L4 w4: v1(1875,2835) 1875,2820 1985,2710 1985,2410 2035,2360 2150,2360 2232,2278 2232,2128 2255,2105 2485,2105 2500,2090 2500,2050 2522,2028 v1(3057,2028) ; v1(2377,2013) 3042,2013 v1(3057,2028)
RASP_GPIO9: J1.92 J6.21 U1.20 U7.20 | length 3743.8
  L1 w4: J6.21@2016.93,3055.2 2020.2,3055.2 2020.2,3058.47 2070,3108.27 2070,3200 2165,3295 2340,3295 2375,3330 J1.92@2375,3425 ; U7.20@2289.57,1863 2363,1863 v1(2370,1870) ; U1.20@2974.57,1878 v1(3063,1878)
  L4 w4: J6.21@2016.93,3055.2 2016.93,3016.93 1975,2975 1975,2825 2045,2755 2045,2445 2070,2420 2190,2420 2285,2325 2285,2170 2300,2155 2535,2155 2555,2135 2555,2115 2570,2100 3090,2100 3125,2065 3125,1940 v1(3063,1878) ; v1(2370,1870) 2371.01,1870 2381.01,1880 2625,1880 2675,1930 3010.99,1930 v1@3063.65,1877.34
RASP_GPIO10: J1.94 J6.19 U1.9 U7.9 | length 2736.9
  L1 w4: v1(1780,1935) 1796.11,1935 1818.11,1913 U7.9@1860.43,1913 ; J6.19@2115.86,3054.14 2210,2960 2290,2960 2390,2860 2390,2080 2450,2020 2450,1940.99 v1(2463,1928) U1.9@2545.43,1928 ; J6.19@2116.93,3055.2 2125.2,3055.2 2125.2,3063.47 2170,3108.27 2170,3215 2230,3275 2350,3275 2395,3320 2395,3420 J1.94@2390,3425
  L4 w4: v1(1780,1935) 2455.99,1935 v1(2463,1928)
RASP_GPIO11: J1.88 J6.23 U1.22 U7.22 | length 3634.9
  L1 w4: v1(1910,2925) 1910,3048.27 J6.23@1916.93,3055.2 1930.2,3055.2 1930.2,3068.47 1970,3108.27 1970,3205 2100,3335 2315,3335 2335,3355 J1.88@2335,3435 ; U7.22@2289.57,1963 2378,1963 v1(2380,1965) ; U1.22@2974.57,1978 v1(3058,1978)
  L4 w4: v1(1910,2925) 1910,2815 2005,2720 2005,2420 2040,2385 2160,2385 2245,2300 2245,2145 2270,2120 2500,2120 2515,2105 2515,2080 2540,2055 3070,2055 3080,2045 3080,2000 v1(3058,1978) ; v1(2380,1965) 2625,1965 2640,1980 v1@3058,1980
RASP_GPIO12: J1.38 J6.32 U5.8 U6.8 | length 2119.1
  L1 w4: U6.8@1105.87,2625 v1(1265.86,2625) 1270,2625 1395,2750 1395,2940 1465,3010 1465,3080 1516.93,3131.93 J6.32@1516.93,3155.2 1516.93,3226.93 1580,3290 1805,3290 1840,3325 J1.38@1840,3420.75 ; U5.8@1845.43,2623 v1(1932,2623)
  L4 w4: v1(1265.86,2625) 1265.86,2625.86 1310,2670 1645,2670 1692,2623 v1(1932,2623)
RASP_GPIO13: J1.36 J6.33 U5.7 U6.7 | length 2141.9
  L1 w4: U6.7@1105.87,2675 1265,2675 1265.43,2675.43 v1(1265.86,2675) 1267.79,2676.94 1276.94,2676.94 1345,2745 1345,2960 1416.93,3031.93 J6.33@1416.93,3055.2 1428.09,3066.36 1428.09,3093.09 1470,3135 1470,3215 1560,3305 1790,3305 1820,3335 J1.36@1820,3420.75 ; U5.7@1845.43,2673 v1(1928,2673)
  L4 w4: v1(1265.86,2675) 1265.86,2675.86 1410,2820 1780.99,2820 v1(1928,2673)
RASP_GPIO14: J1.93 J6.8 U2.8 U3.20 | length 2358
  L1 w4: J1.93@2392.48,3566.42 2392.48,3608.71 2400.04,3616.27 v1(2400.04,3619.99) ; U3.20@2969.57,2518 2971.07,2516.5 3043.5,2516.5 v1(3045,2515) ; v1(3045,3605) 3125.43,3605 3130.43,3600 U2.8@3135.43,3605
  L4 w4: v1(3045,2515) 2965,2595 2965,2730 2694.05,3000.95 2670,3025 2670,3095 2716.93,3141.93 2716.93,3148.56 J6.8@2716.93,3155.2 2716.93,3163.07 2680,3200 2635,3200 2530,3305 2530,3355 2400,3485 2400,3619.94 v1(2400.04,3619.99) 2450,3670 2810,3670 2875,3605 v1(3045,3605)
RASP_GPIO15: J1.91 J6.10 U2.22 U3.6 | length 2635.5
  L1 w4: J1.91@2372.8,3566.42 2370,3569.21 2370,3610 2385,3625 v1(2385,3640) ; v1(2465.86,2720) 2466.86,2719 2539.43,2719 U3.6@2540.43,2718 ; U2.22@3564.57,3605 v1(3645,3605)
  L4 w4: v1(2465.86,2720) 2465.86,2875.86 2570,2980 2570,3080 2607.31,3117.31 2607.31,3145.58 J6.10@2616.93,3155.2 2600,3172.13 2600,3210 2515,3295 2515,3350 2380,3485 2380,3631.29 2385,3636.29 v1(2385,3640) 2435,3690 2830,3690 2890,3630 3295,3630 3320,3605 v1(3645,3605)
RASP_GPIO16: J1.34 J6.36 U5.6 U6.6 | length 2106.4
  L1 w4: U6.6@1105.87,2725 1275,2725 v1(1295,2745) 1295,2955 1370,3030 1370,3105 J6.36@1318.36,3156.64 ; J6.36@1316.93,3155.2 J6.36@1318.36,3156.64 ; J1.34@1800,3420.75 1800,3345 1780,3325 1545,3325 1435,3215 1376.73,3215 J6.36@1318.36,3156.64 ; U5.6@1845.43,2723 v1(1928,2723)
  L4 w4: v1(1295,2745) 1296.51,2746.51 1306.51,2746.51 1395,2835 1830,2835 1928,2737 v1(1928,2723)
RASP_GPIO17: J1.89 J6.11 U2.7 U3.7 | length 2087
  L1 w4: J1.89@2353.11,3566.42 2354.06,3567.36 2354.06,3624.06 v1(2355,3625) ; v1(2465.86,2675) 2469.57,2675 2476.57,2668 U3.7@2540.43,2668 ; v1(3045,3655) U2.7@3135.43,3655
  L4 w4: v1(2465.86,2675) 2460,2675 2440,2695 2440,2880 2516.93,2956.93 J6.11@2516.93,3055.2 2516.93,3076.93 2565,3125 2565,3215 2495,3285 2495,3345 2355,3485 v1(2355,3625) 2355,3640 2425,3710 2850,3710 2905,3655 v1(3045,3655)
RASP_GPIO18: J1.87 J6.12 U2.23 U3.8 | length 2778
  L1 w4: J1.87@2333.43,3566.42 2334.21,3567.2 2334.21,3639.21 v1(2335,3640) ; v1(2465.86,2620) 2466.86,2619 2539.43,2619 U3.8@2540.43,2618 ; U2.23@3564.57,3655 v1(3645,3655)
  L4 w4: v1(2465.86,2620) 2460,2620 2420,2660 2420,2890 2465,2935 2465,3090 2516.93,3141.93 J6.12@2516.93,3155.2 ; J6.12@2515,3148.56 2515,3230 2480,3265 2480,3335 2335,3480 v1(2335,3640) 2335,3650 2415,3730 2870,3730 2920,3680 3300,3680 3325,3655 v1(3645,3655)
RASP_GPIO19: J1.32 J6.35 | length 775.5
  L1 w4: J6.35@1316.93,3055.2 1316.93,3058.07 1314.06,3058.07 1270,3102.13 1270,3185 1300,3215 1335,3215 1355,3235 1415,3235 1525,3345 1760,3345 1780,3365 J1.32@1780,3405
RASP_GPIO20: J1.30 J6.38 | length 707.4
  L1 w4: J6.38@1216.93,3155.2 1216.93,3196.93 1280,3260 1410,3260 1515,3365 1750,3365 1765,3380 1765,3418.31 J1.30@1762.56,3420.75
RASP_GPIO21: J1.2 J6.40 | length 503.8
  L1 w4: J6.40@1116.93,3155.2 1116.93,3161.93 1260,3305 1405,3305 1486.97,3386.97 J1.2@1486.97,3420.75